# Altium PCB mcu.PcbDoc (part 1 of 3)
Units mil, origin at the board's own origin, x right, y up, seen from the top; angles counter-clockwise.
Board outline 2000 x 2000 mil, 2 copper layers (Top Layer, Bottom Layer); 145 components, 109 nets, 608 pads, 708 vias.
Unrouted connection lines stored in the file: 2.
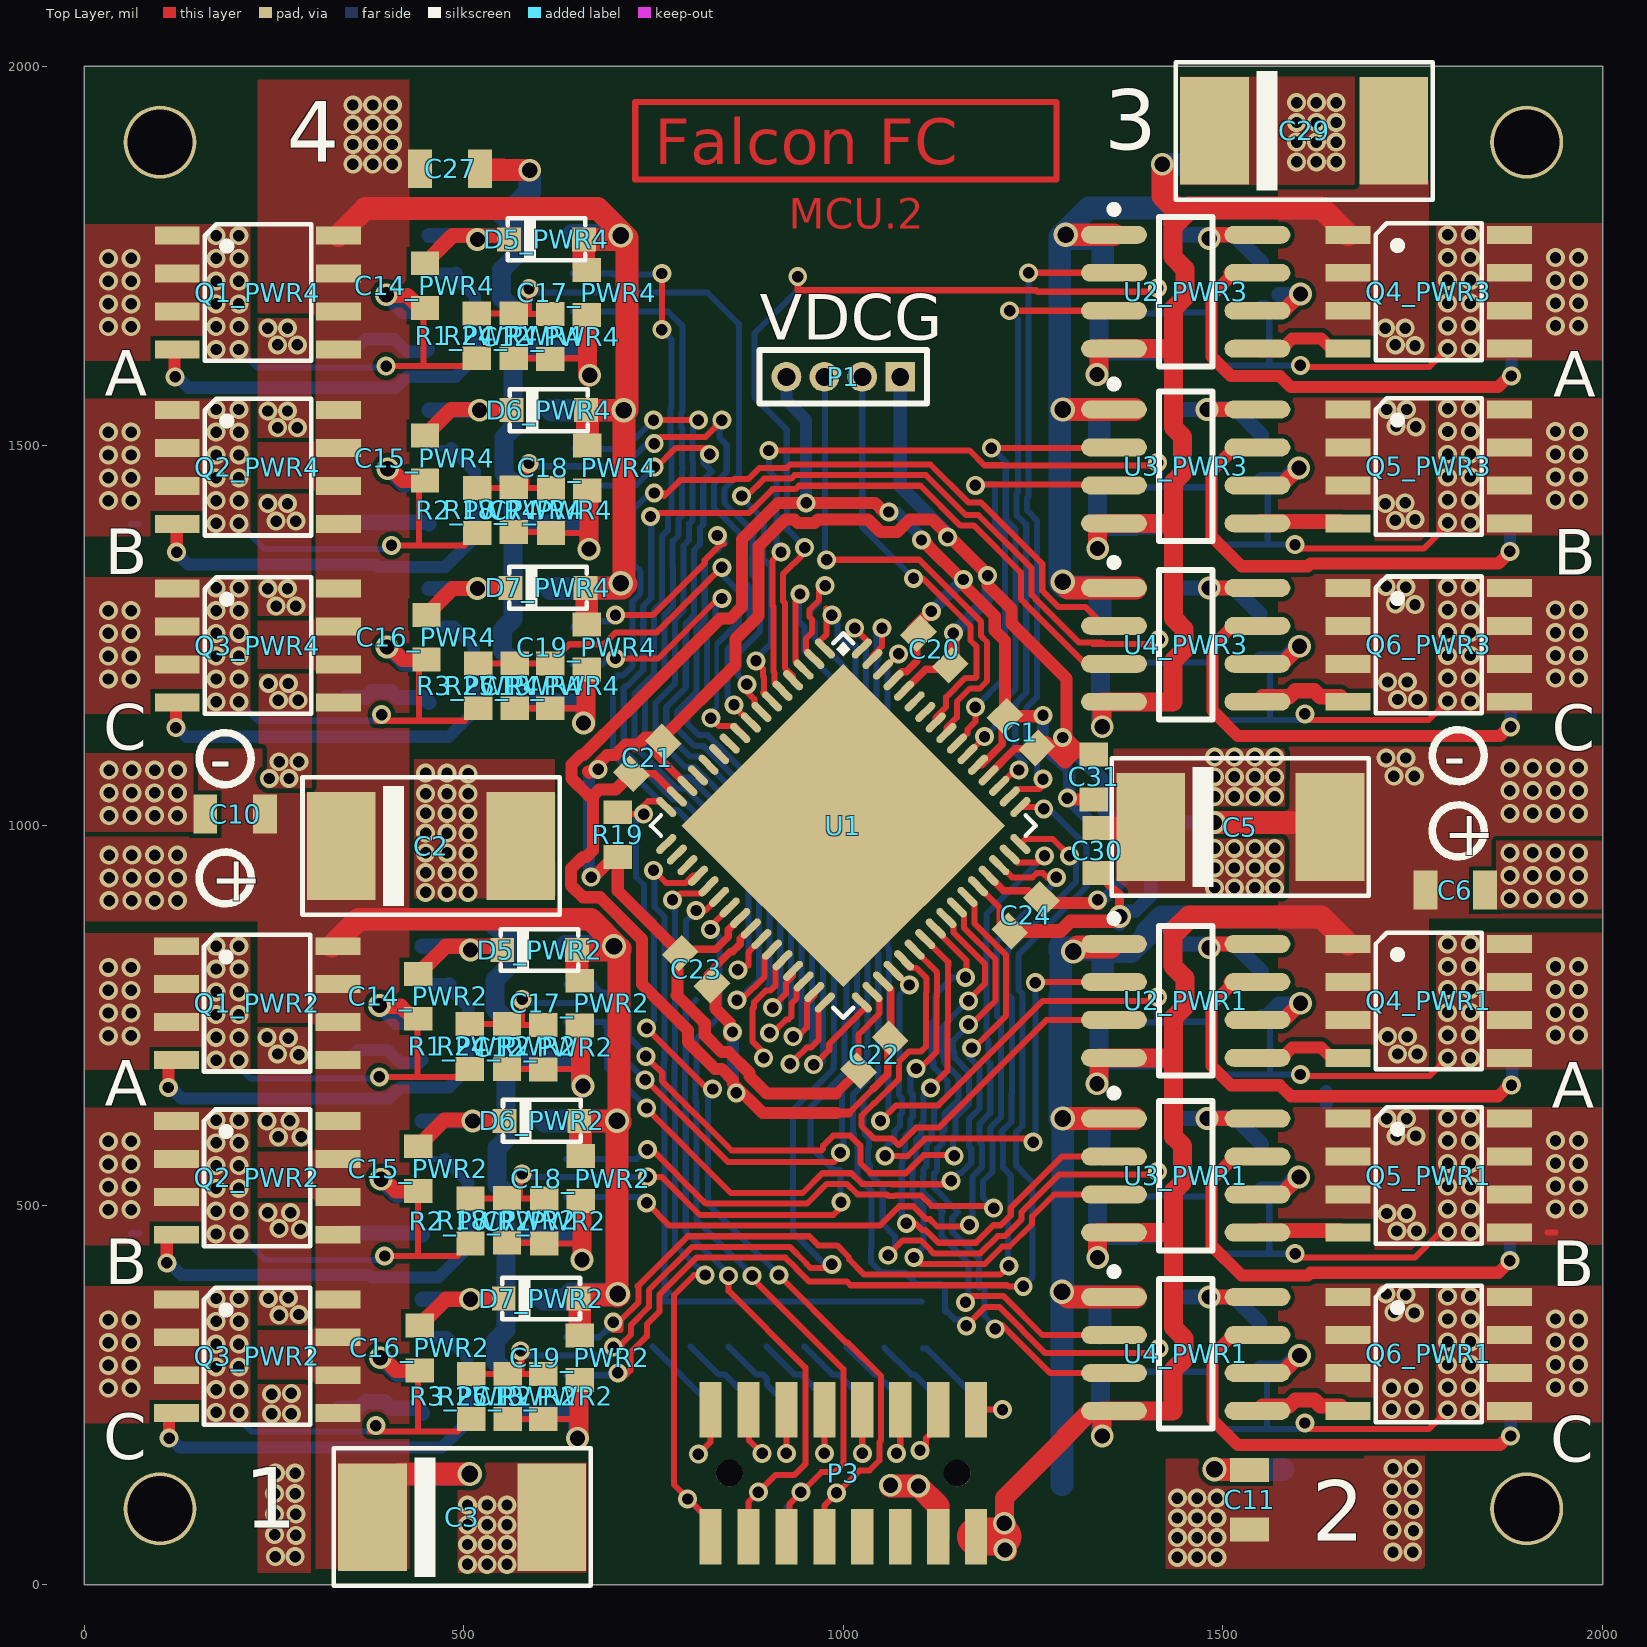
[diagram p0: Top Layer view]
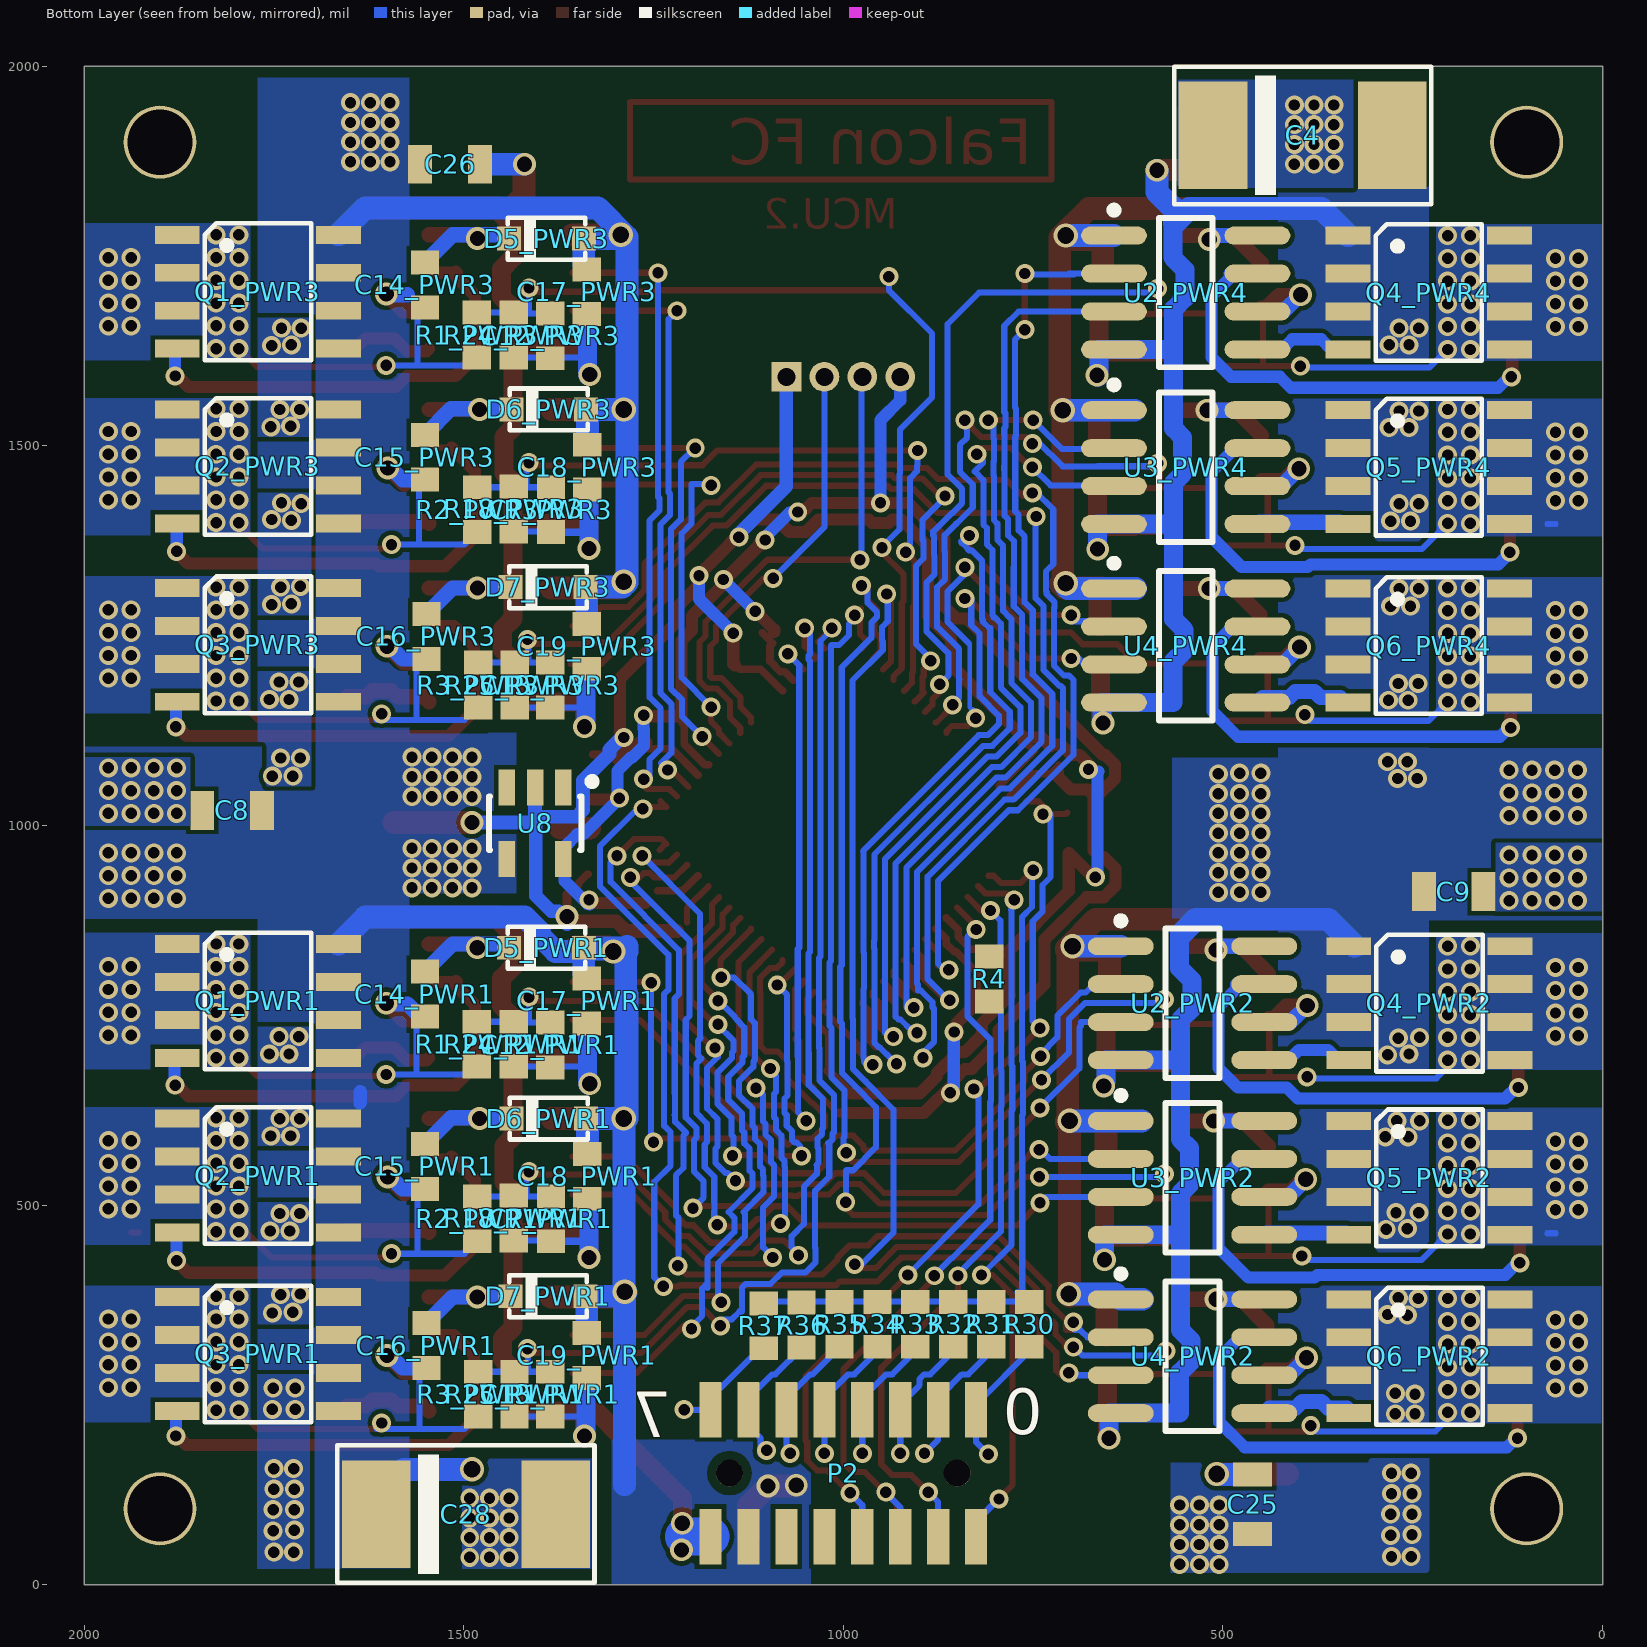
[diagram p1: Bottom Layer view, seen from below]

## Layer stack, top to bottom
Top Layer: signal copper 1.4
Dielectric: dielectric 12.6, FR-4, Dk 4.8
Bottom Layer: signal copper 1.4

## Board outline
0,0 0,2000 2000,2000 2000,0

## Design rules (kind name [scope] priority, off if disabled: settings)
Clearance [All] p1: gap=6
HoleSize [All] p1: absolutevalues=TRUE maxlimit=100 minlimit=15 maxpercent=80.000 minpercent=20.000
MinimumAnnularRing [All] p1: minimumring=5
PlaneClearance [All] p1: clearance=8
PlaneConnect PlaneConnect_1 [All] p1: planeconnectstyle=Relief reliefexpansion=20 reliefentries=4 reliefconductorwidth=10 reliefairgap=10
PlaneConnect [InNet('VBAT')] p2: planeconnectstyle=Direct reliefexpansion=20 reliefentries=4 reliefconductorwidth=10 reliefairgap=10
PolygonConnect PolygonConnect_1 [(InNet('VBAT') OR InNet('VGND') OR InNet('AH1') OR InNetClass('OUTA[1..4]') OR InNetClass('OUTB[1..4]') OR InNetClass('OUTC[1..4]'))] p1: connectstyle=Direct reliefconductorwidth=10 reliefentries=4 polygonreliefangle="90 Angle"
PolygonConnect [All] p2: connectstyle=Relief reliefconductorwidth=10 reliefentries=4 polygonreliefangle="90 Angle"
RoomDefinition PWR3 [InComponentClass('PWR3')] p1: confinementstyle=ConfineIn formatcopy=TRUE lockcomponents=FALSE outline 1268,1831 1915,1831 1915,1109 1268,1109
RoomDefinition PWR4 [InComponentClass('PWR4')] p2: confinementstyle=ConfineIn formatcopy=TRUE lockcomponents=FALSE outline 733,1831 86,1831 86,1109 733,1109
RoomDefinition PWR2 [InComponentClass('PWR2')] p3: confinementstyle=ConfineIn formatcopy=TRUE lockcomponents=FALSE outline 722,894 75,894 75,172 722,172
RoomDefinition PWR1 [InComponentClass('PWR1')] p4: confinementstyle=ConfineIn formatcopy=TRUE lockcomponents=FALSE outline 1270,896 1917,896 1917,174 1270,174
RoutingVias [All] p1: holewidth=15 width=25 viastyle="Through Hole" minholewidth=15 minwidth=25 maxholewidth=100 maxwidth=200
SilkscreenOverComponentPads [All] p1: minsilkscreentomaskgap=10
SolderMaskExpansion [All] p1: expansion=4
Width [All] p1: maxlimit=100 minlimit=6 preferedwidth=6 checkconnectedcopper=TRUE
24 further rules are at their usual default settings.

## Classes and differential pairs
net class OUTC[1..4]: OUTC1 OUTC2 OUTC3 OUTC4
net class OUTB[1..4]: OUTB1 OUTB2 OUTB3 OUTB4
net class OUTA[1..4]: OUTA1 OUTA2 OUTA3 OUTA4
channel class power_channel: PWR1 PWR2 PWR3 PWR4
net class SENSEC[1..4]: SENSEC1 SENSEC2 SENSEC3 SENSEC4
net class SENSEB[1..4]: SENSEB1 SENSEB2 SENSEB3 SENSEB4
net class SENSEA[1..4]: SENSEA1 SENSEA2 SENSEA3 SENSEA4
net class CL[1..4]: CL1 CL2 CL3 CL4
net class CH[1..4]: CH1 CH2 CH3 CH4
net class BL[1..4]: BL1 BL2 BL3 BL4
net class BH[1..4]: BH1 BH2 BH3 BH4
net class AL[1..4]: AL1 AL2 AL3 AL4
net class AH[1..4]: AH1 AH2 AH3 AH4
component class PWR4: C7_PWR4 C12_PWR4 C13_PWR4 C14_PWR4 C15_PWR4 C16_PWR4 C17_PWR4 C18_PWR4 C19_PWR4 D5_PWR4 D6_PWR4 D7_PWR4 Q1_PWR4 Q2_PWR4 Q3_PWR4 Q4_PWR4 Q5_PWR4 Q6_PWR4 R1_PWR4 R2_PWR4 R3_PWR4 R18_PWR4 R24_PWR4 R25_PWR4 TP9_PWR4 TP10_PWR4 TP11_PWR4 TP12_PWR4 TP13_PWR4 TP14_PWR4 TP15_PWR4 TP16_PWR4 TP17_PWR4 TP18_PWR4 TP19_PWR4 TP20_PWR4 TP21_PWR4 TP22_PWR4 TP23_PWR4 TP24_PWR4 TP25_PWR4 TP26_PWR4 U2_PWR4 U3_PWR4 U4_PWR4
component class PWR3: C7_PWR3 C12_PWR3 C13_PWR3 C14_PWR3 C15_PWR3 C16_PWR3 C17_PWR3 C18_PWR3 C19_PWR3 D5_PWR3 D6_PWR3 D7_PWR3 Q1_PWR3 Q2_PWR3 Q3_PWR3 Q4_PWR3 Q5_PWR3 Q6_PWR3 R1_PWR3 R2_PWR3 R3_PWR3 R18_PWR3 R24_PWR3 R25_PWR3 TP9_PWR3 TP10_PWR3 TP11_PWR3 TP12_PWR3 TP13_PWR3 TP14_PWR3 TP15_PWR3 TP16_PWR3 TP17_PWR3 TP18_PWR3 TP19_PWR3 TP20_PWR3 TP21_PWR3 TP22_PWR3 TP23_PWR3 TP24_PWR3 TP25_PWR3 TP26_PWR3 U2_PWR3 U3_PWR3 U4_PWR3
component class PWR2: C7_PWR2 C12_PWR2 C13_PWR2 C14_PWR2 C15_PWR2 C16_PWR2 C17_PWR2 C18_PWR2 C19_PWR2 D5_PWR2 D6_PWR2 D7_PWR2 Q1_PWR2 Q2_PWR2 Q3_PWR2 Q4_PWR2 Q5_PWR2 Q6_PWR2 R1_PWR2 R2_PWR2 R3_PWR2 R18_PWR2 R24_PWR2 R25_PWR2 TP9_PWR2 TP10_PWR2 TP11_PWR2 TP12_PWR2 TP13_PWR2 TP14_PWR2 TP15_PWR2 TP16_PWR2 TP17_PWR2 TP18_PWR2 TP19_PWR2 TP20_PWR2 TP21_PWR2 TP22_PWR2 TP23_PWR2 TP24_PWR2 TP25_PWR2 TP26_PWR2 U2_PWR2 U3_PWR2 U4_PWR2
component class PWR1: C7_PWR1 C12_PWR1 C13_PWR1 C14_PWR1 C15_PWR1 C16_PWR1 C17_PWR1 C18_PWR1 C19_PWR1 D5_PWR1 D6_PWR1 D7_PWR1 Q1_PWR1 Q2_PWR1 Q3_PWR1 Q4_PWR1 Q5_PWR1 Q6_PWR1 R1_PWR1 R2_PWR1 R3_PWR1 R18_PWR1 R24_PWR1 R25_PWR1 TP9_PWR1 TP10_PWR1 TP11_PWR1 TP12_PWR1 TP13_PWR1 TP14_PWR1 TP15_PWR1 TP16_PWR1 TP17_PWR1 TP18_PWR1 TP19_PWR1 TP20_PWR1 TP21_PWR1 TP22_PWR1 TP23_PWR1 TP24_PWR1 TP25_PWR1 TP26_PWR1 U2_PWR1 U3_PWR1 U4_PWR1
component class mcu: C1 C2 C3 C4 C5 C6 C7 C8 C9 C10 C11 C12 C15 C16 C18 C19 C20 C21 C22 C23 C24 C25 C26 C27 C28 C29 C30 C31 C32 C33 C34 C35 C36 C37 C38 C39 C40 C41 C42 C43 D6 D7 D8 D9 D10 D11 D12 D13 D14 D15 D16 P1 P2 P3 Q7 Q8 Q9 Q10 Q11 Q12 Q13 Q14 Q15 Q16 Q17 Q18 Q19 Q20 Q21 Q22 Q23 Q24 R2 R3 R4 R5 R6 R7 R8 R9 R10 R11 R12 R13 R14 R15 R16 R17 R18 R19 R20 R21 R22 R23 R24 R30 R31 R32 R33 R34 R35 R36 R37 TP1 TP2 TP3 TP4 TP5 TP6 TP7 TP8 TP? U1 U5 U6 U7 U8 U9 U10 U11 U12 U13 U14

## Components (designator, comment, footprint, x,y, rotation, side; value= is the part's Value field where it differs from the comment)
C1 "Capacitor" "0603 (1608)" 1234,1123 r315 top
C2 "Polarized Capacitor" "7343 (TANT E)" 457,973 r0 top
C3 "Polarized Capacitor" "7343 (TANT E)" 498,89 r0 top
C4 "Polarized Capacitor" "7343 (TANT E)" 395,1909 r180 bottom
C5 "Polarized Capacitor" "7343 (TANT E)" 1523,998 r0 top
C6 "Capacitor" "0805 (2012)" 1806,915 r180 top
C7_PWR1 "Capacitor" "0603 (1608)" 1385,482 r270 bottom (schematic designator C7)
C7_PWR2 "Capacitor" "0603 (1608)" 606.01,479 r270 top (schematic designator C7)
C7_PWR3 "Capacitor" "0603 (1608)" 1384.99,1416 r270 bottom (schematic designator C7)
C7_PWR4 "Capacitor" "0603 (1608)" 615.01,1415 r270 top (schematic designator C7)
C8 "Capacitor" "0805 (2012)" 1805,1020 r0 bottom
C9 "Capacitor" "0805 (2012)" 196,913 r0 bottom
C10 "Capacitor" "0805 (2012)" 199,1015 r180 top
C11 "Capacitor" "0805 (2012)" 1535,112 r270 top
C12_PWR1 "Capacitor" "0603 (1608)" 1386,711 r270 bottom (schematic designator C12)
C12_PWR2 "Capacitor" "0603 (1608)" 605.01,708 r270 top (schematic designator C12)
C12_PWR3 "Capacitor" "0603 (1608)" 1385.99,1645 r270 bottom (schematic designator C12)
C12_PWR4 "Capacitor" "0603 (1608)" 614.01,1644 r270 top (schematic designator C12)
C13_PWR1 "Capacitor" "0603 (1608)" 1386,251 r270 bottom (schematic designator C13)
C13_PWR2 "Capacitor" "0603 (1608)" 605.01,248 r270 top (schematic designator C13)
C13_PWR3 "Capacitor" "0603 (1608)" 1385.99,1185 r270 bottom (schematic designator C13)
C13_PWR4 "Capacitor" "0603 (1608)" 614.01,1184 r270 top (schematic designator C13)
C14_PWR1 "Capacitor" "0603 (1608)" 1551,778 r270 bottom (schematic designator C14)
C14_PWR2 "Capacitor" "0603 (1608)" 440.01,775 r270 top (schematic designator C14)
C14_PWR3 "Capacitor" "0603 (1608)" 1550.99,1712 r270 bottom (schematic designator C14)
C14_PWR4 "Capacitor" "0603 (1608)" 449.01,1711 r270 top (schematic designator C14)
C15_PWR1 "Capacitor" "0603 (1608)" 1551,551 r270 bottom (schematic designator C15)
C15_PWR2 "Capacitor" "0603 (1608)" 440.01,548 r270 top (schematic designator C15)
C15_PWR3 "Capacitor" "0603 (1608)" 1550.99,1485 r270 bottom (schematic designator C15)
C15_PWR4 "Capacitor" "0603 (1608)" 449.01,1484 r270 top (schematic designator C15)
C16_PWR1 "Capacitor" "0603 (1608)" 1549,315 r270 bottom (schematic designator C16)
C16_PWR2 "Capacitor" "0603 (1608)" 442.01,312 r270 top (schematic designator C16)
C16_PWR3 "Capacitor" "0603 (1608)" 1548.99,1249 r270 bottom (schematic designator C16)
C16_PWR4 "Capacitor" "0603 (1608)" 451.01,1248 r270 top (schematic designator C16)
C17_PWR1 "Capacitor" "0603 (1608)" 1338,769 r270 bottom (schematic designator C17)
C17_PWR2 "Capacitor" "0603 (1608)" 653.01,766 r270 top (schematic designator C17)
C17_PWR3 "Capacitor" "0603 (1608)" 1337.99,1703 r270 bottom (schematic designator C17)
C17_PWR4 "Capacitor" "0603 (1608)" 662.01,1702 r270 top (schematic designator C17)
C18_PWR1 "Capacitor" "0603 (1608)" 1337,538 r270 bottom (schematic designator C18)
C18_PWR2 "Capacitor" "0603 (1608)" 654.01,535 r270 top (schematic designator C18)
C18_PWR3 "Capacitor" "0603 (1608)" 1336.99,1472 r270 bottom (schematic designator C18)
C18_PWR4 "Capacitor" "0603 (1608)" 663.01,1471 r270 top (schematic designator C18)
C19_PWR1 "Capacitor" "0603 (1608)" 1338,302 r270 bottom (schematic designator C19)
C19_PWR2 "Capacitor" "0603 (1608)" 653.01,299 r270 top (schematic designator C19)
C19_PWR3 "Capacitor" "0603 (1608)" 1337.99,1236 r270 bottom (schematic designator C19)
C19_PWR4 "Capacitor" "0603 (1608)" 662.01,1235 r270 top (schematic designator C19)
C20 "Capacitor" "0603 (1608)" 1120,1232 r315 top
C21 "Capacitor" "0603 (1608)" 742,1089 r45 top
C22 "Capacitor" "0603 (1608)" 1041,698 r225 top
C23 "Capacitor" "0603 (1608)" 806,811 r135 top
C24 "Capacitor" "0603 (1608)" 1240,882 r225 top
C25 "Capacitor" "0805 (2012)" 461,106 r270 bottom
C26 "Capacitor" "0805 (2012)" 1518,1871 r180 bottom
C27 "Capacitor" "0805 (2012)" 482,1865 r0 top
C28 "Polarized Capacitor" "7343 (TANT E)" 1497,93 r180 bottom
C29 "Polarized Capacitor" "7343 (TANT E)" 1607,1915 r0 top
C30 "Capacitor" "0603 (1608)" 1334,967 r270 top
C31 "Capacitor" "0603 (1608)" 1330,1064 r90 top
D5_PWR1 "Schottky Diode" SOD-323 1391,839 r180 bottom (schematic designator D5)
D5_PWR2 "Schottky Diode" SOD-323 600.01,836 r0 top (schematic designator D5)
D5_PWR3 "Schottky Diode" SOD-323 1390.99,1773 r180 bottom (schematic designator D5)
D5_PWR4 "Schottky Diode" SOD-323 609.01,1772 r0 top (schematic designator D5)
D6_PWR1 "Schottky Diode" SOD-323 1388,614 r180 bottom (schematic designator D6)
D6_PWR2 "Schottky Diode" SOD-323 603.01,611 r0 top (schematic designator D6)
D6_PWR3 "Schottky Diode" SOD-323 1387.99,1548 r180 bottom (schematic designator D6)
D6_PWR4 "Schottky Diode" SOD-323 612.01,1547 r0 top (schematic designator D6)
D7_PWR1 "Schottky Diode" SOD-323 1389,380 r180 bottom (schematic designator D7)
D7_PWR2 "Schottky Diode" SOD-323 602.01,377 r0 top (schematic designator D7)
D7_PWR3 "Schottky Diode" SOD-323 1388.99,1314 r180 bottom (schematic designator D7)
D7_PWR4 "Schottky Diode" SOD-323 611.01,1313 r0 top (schematic designator D7)
P1 "MHDR1X4" MHDR1X4 1075,1591 r180 top
P2 "2x8smd0.5female" S9007E-08-ND 1000,147 r0 bottom
P3 "2x8smd0.5male" S9007E-08-ND-noholes 1000,147 r0 top
Q1_PWR1 "IRF8734" SO8 1771,769 r180 bottom (schematic designator Q1)
Q1_PWR2 "IRF8734" SO8 228.01,766 r0 top (schematic designator Q1)
Q1_PWR3 "IRF8734" SO8 1770.99,1703 r180 bottom (schematic designator Q1)
Q1_PWR4 "IRF8734" SO8 229.01,1702 r0 top (schematic designator Q1)
Q2_PWR1 "IRF8734" SO8 1771,539 r180 bottom (schematic designator Q2)
Q2_PWR2 "IRF8734" SO8 228.01,536 r0 top (schematic designator Q2)
Q2_PWR3 "IRF8734" SO8 1770.99,1473 r180 bottom (schematic designator Q2)
Q2_PWR4 "IRF8734" SO8 229.01,1472 r0 top (schematic designator Q2)
Q3_PWR1 "IRF8734" SO8 1771,304 r180 bottom (schematic designator Q3)
Q3_PWR2 "IRF8734" SO8 228.01,301 r0 top (schematic designator Q3)
Q3_PWR3 "IRF8734" SO8 1770.99,1238 r180 bottom (schematic designator Q3)
Q3_PWR4 "IRF8734" SO8 229.01,1237 r0 top (schematic designator Q3)
Q4_PWR1 "IRF8734" SO8 1771,769 r0 top (schematic designator Q4)
Q4_PWR2 "IRF8734" SO8 228.01,766 r180 bottom (schematic designator Q4)
Q4_PWR3 "IRF8734" SO8 1770.99,1703 r0 top (schematic designator Q4)
Q4_PWR4 "IRF8734" SO8 229.01,1702 r180 bottom (schematic designator Q4)
Q5_PWR1 "IRF8734" SO8 1771,539 r0 top (schematic designator Q5)
Q5_PWR2 "IRF8734" SO8 228.01,536 r180 bottom (schematic designator Q5)
Q5_PWR3 "IRF8734" SO8 1770.99,1473 r0 top (schematic designator Q5)
Q5_PWR4 "IRF8734" SO8 229.01,1472 r180 bottom (schematic designator Q5)
Q6_PWR1 "IRF8734" SO8 1771,304 r0 top (schematic designator Q6)
Q6_PWR2 "IRF8734" SO8 228.01,301 r180 bottom (schematic designator Q6)
Q6_PWR3 "IRF8734" SO8 1770.99,1238 r0 top (schematic designator Q6)
Q6_PWR4 "IRF8734" SO8 229.01,1237 r180 bottom (schematic designator Q6)
R1_PWR1 "Resistor" "0603 (1608)" 1483,712 r270 bottom (schematic designator R1)
R1_PWR2 "Resistor" "0603 (1608)" 508.01,709 r270 top (schematic designator R1)
R1_PWR3 "Resistor" "0603 (1608)" 1482.99,1646 r270 bottom (schematic designator R1)
R1_PWR4 "Resistor" "0603 (1608)" 517.01,1645 r270 top (schematic designator R1)
R2_PWR1 "Resistor" "0603 (1608)" 1482,482 r270 bottom (schematic designator R2)
R2_PWR2 "Resistor" "0603 (1608)" 509.01,479 r270 top (schematic designator R2)
R2_PWR3 "Resistor" "0603 (1608)" 1481.99,1416 r270 bottom (schematic designator R2)
R2_PWR4 "Resistor" "0603 (1608)" 518.01,1415 r270 top (schematic designator R2)
R3_PWR1 "Resistor" "0603 (1608)" 1481,251 r270 bottom (schematic designator R3)
R3_PWR2 "Resistor" "0603 (1608)" 510.01,248 r270 top (schematic designator R3)
R3_PWR3 "Resistor" "0603 (1608)" 1480.99,1185 r270 bottom (schematic designator R3)
R3_PWR4 "Resistor" "0603 (1608)" 519.01,1184 r270 top (schematic designator R3)
R4 "Resistor" "0603 (1608)" 808,798 r90 bottom
R18_PWR1 "Resistor" "0603 (1608)" 1434,483 r270 bottom (schematic designator R18)
R18_PWR2 "Resistor" "0603 (1608)" 557.01,480 r270 top (schematic designator R18)
R18_PWR3 "Resistor" "0603 (1608)" 1433.99,1417 r270 bottom (schematic designator R18)
R18_PWR4 "Resistor" "0603 (1608)" 566.01,1416 r270 top (schematic designator R18)
R19 "Resistor" "0603 (1608)" 703,988 r90 top
R24_PWR1 "Resistor" "0603 (1608)" 1434,712 r270 bottom (schematic designator R24)
R24_PWR2 "Resistor" "0603 (1608)" 557.01,709 r270 top (schematic designator R24)
R24_PWR3 "Resistor" "0603 (1608)" 1433.99,1646 r270 bottom (schematic designator R24)
R24_PWR4 "Resistor" "0603 (1608)" 566.01,1645 r270 top (schematic designator R24)
R25_PWR1 "Resistor" "0603 (1608)" 1433,251 r270 bottom (schematic designator R25)
R25_PWR2 "Resistor" "0603 (1608)" 558.01,248 r270 top (schematic designator R25)
R25_PWR3 "Resistor" "0603 (1608)" 1432.99,1185 r270 bottom (schematic designator R25)
R25_PWR4 "Resistor" "0603 (1608)" 567.01,1184 r270 top (schematic designator R25)
R30 "Resistor" "0603 (1608)" 755,343 r270 bottom
R31 "Resistor" "0603 (1608)" 805,343 r270 bottom
R32 "Resistor" "0603 (1608)" 855,343 r270 bottom
R33 "Resistor" "0603 (1608)" 905,343 r270 bottom
R34 "Resistor" "0603 (1608)" 955,343 r270 bottom
R35 "Resistor" "0603 (1608)" 1005,343 r270 bottom
R36 "Resistor" "0603 (1608)" 1055,342 r270 bottom
R37 "Resistor" "0603 (1608)" 1105,341 r270 bottom
U1 "ATXMEGAA3" QFN-64 1000,1000 r315 top
U2_PWR1 "LM5109BMA" M08A_N 1451,769 r0 top (schematic designator U2)
U2_PWR2 "LM5109BMA" M08A_N 540.01,766 r180 bottom (schematic designator U2)
U2_PWR3 "LM5109BMA" M08A_N 1450.99,1703 r0 top (schematic designator U2)
U2_PWR4 "LM5109BMA" M08A_N 549.01,1702 r180 bottom (schematic designator U2)
U3_PWR1 "LM5109BMA" M08A_N 1451,539 r0 top (schematic designator U3)
U3_PWR2 "LM5109BMA" M08A_N 540.01,536 r180 bottom (schematic designator U3)
U3_PWR3 "LM5109BMA" M08A_N 1450.99,1473 r0 top (schematic designator U3)
U3_PWR4 "LM5109BMA" M08A_N 549.01,1472 r180 bottom (schematic designator U3)
U4_PWR1 "LM5109BMA" M08A_N 1451,304 r0 top (schematic designator U4)
U4_PWR2 "LM5109BMA" M08A_N 540.01,301 r180 bottom (schematic designator U4)
U4_PWR3 "LM5109BMA" M08A_N 1450.99,1238 r0 top (schematic designator U4)
U4_PWR4 "LM5109BMA" M08A_N 549.01,1237 r180 bottom (schematic designator U4)
U8 "TPS71533" SOT23-5 1406,1003 r270 bottom

## Footprints (in the part's own frame and the unit in brackets; to place one, negate y for a bottom-side part, rotate by r counter-clockwise, add the part's x,y. Pads: shape width x height; smd on the part's side, far side on the other; paste and mask are expansions set on the pad)
"0603 (1608)" [mm] "Chip 2-Leads 0603 (1608)"
  rect 0.8x0.95 smd mask+0: 1(-0.75,0) 2(0.75,0)
  body extent -0.77,-0.43 0.77,0.43, height 0.55
"0805 (2012)" [mm] "Chip 2-Leads, IPC Medium Density (2012)"
  rect 0.8x1.3 smd mask+0: 1(-1,0) 2(1,0)
  body extent -1.05,-0.63 1.05,0.63, height 0.5
"7343 (TANT E)" [mm] "Tantalum SMT Case E 7343"
  rect 2.3x3.6 smd paste-0.15 mask+0.025: 1(-3,0) 2(3,0)
  silkscreen extent -4.3,-2.3 4.3,2.3, body extent -3.65,-2.14 3.65,2.16, height 2.25
M08A_N [mm] "SOIC, 8-Leads, Body 4.9x3.9mm, Pitch 1.27mm, IPC Medium Density"
  oval 2.2x0.6 smd: 1(-2.4,1.905) 2(-2.4,0.635) 3(-2.4,-0.635) 4(-2.4,-1.905) 5(2.4,-1.905) 6(2.4,-0.635) 7(2.4,0.635) 8(2.4,1.905)
  silkscreen extent -2.52,-2.5 0.9,2.88, body extent -2,-2.5 2,2.5, height 1.75
MHDR1X4 [mm] "Connector; Header; 4 Position"
  rect 1x1 hole 0.6: 1(0,0)
  round 1 hole 0.6: 2(1.27,0) 3(2.54,0) 4(3.81,0)
  silkscreen extent -0.9,-0.9 4.71,0.9
QFN-64 [mm] "64M2, 64-pad, 9 x 9 x 1.0 mm Body, Lead Pitch 0.50mm 7.65mm Exposed Pad"
  oval 0.85x0.25 smd paste-0.02 mask+0.02: 1(-4.625,3.75) 2(-4.625,3.25) 3(-4.625,2.75) 4(-4.625,2.25) 5(-4.625,1.75) 6(-4.625,1.25) 7(-4.625,0.75) 8(-4.625,0.25) 9(-4.625,-0.25) 10(-4.625,-0.75) 11(-4.625,-1.25) 12(-4.625,-1.75) 13(-4.625,-2.25) 14(-4.625,-2.75) 15(-4.625,-3.25) 16(-4.625,-3.75) 33(4.625,-3.75) 34(4.625,-3.25) 35(4.625,-2.75) 36(4.625,-2.25) 37(4.625,-1.75) 38(4.625,-1.25) 39(4.625,-0.75) 40(4.625,-0.25) 41(4.625,0.25) 42(4.625,0.75) 43(4.625,1.25) 44(4.625,1.75) 45(4.625,2.25) 46(4.625,2.75) 47(4.625,3.25) 48(4.625,3.75)
  oval 0.25x0.85 smd paste-0.02 mask+0.02: 17(-3.75,-4.625) 18(-3.25,-4.625) 19(-2.75,-4.625) 20(-2.25,-4.625) 21(-1.75,-4.625) 22(-1.25,-4.625) 23(-0.75,-4.625) 24(-0.25,-4.625) 25(0.25,-4.625) 26(0.75,-4.625) 27(1.25,-4.625) 28(1.75,-4.625) 29(2.25,-4.625) 30(2.75,-4.625) 31(3.25,-4.625) 32(3.75,-4.625) 49(3.75,4.625) 50(3.25,4.625) 51(2.75,4.625) 52(2.25,4.625) 53(1.75,4.625) 54(1.25,4.625) 55(0.75,4.625) 56(0.25,4.625) 57(-0.25,4.625) 58(-0.75,4.625) 59(-1.25,4.625) 60(-1.75,4.625) 61(-2.25,4.625) 62(-2.75,4.625) 63(-3.25,4.625) 64(-3.75,4.625)
  rect 7.65x7.65 smd paste-10 mask+0.051: 65(0,0)
  silkscreen extent -4.55,-4.55 4.55,4.55, body extent -4.55,-4.55 4.55,4.55, height 1
S9007E-08-ND [mm] "16 0.05\" smd header - female"
  round 0.889 hole 0.9 unplated: 0(-3.81,0) 0(3.81,0)
  rect 0.74x1.85 smd: 1(-4.445,2.125) 2(-4.445,-2.125) 3(-3.175,2.125) 4(-3.175,-2.125) 5(-1.905,2.125) 6(-1.905,-2.125) 7(-0.635,2.125) 8(-0.635,-2.125) 9(0.635,2.125) 10(0.635,-2.125) 11(1.905,2.125) 12(1.905,-2.125) 13(3.175,2.125) 14(3.175,-2.125) 15(4.445,2.125) 16(4.445,-2.125)
S9007E-08-ND-noholes [mm] "16 0.05\" smd header - female"
  rect 0.74x1.85 smd: 1(-4.445,2.125) 2(-4.445,-2.125) 3(-3.175,2.125) 4(-3.175,-2.125) 5(-1.905,2.125) 6(-1.905,-2.125) 7(-0.635,2.125) 8(-0.635,-2.125) 9(0.635,2.125) 10(0.635,-2.125) 11(1.905,2.125) 12(1.905,-2.125) 13(3.175,2.125) 14(3.175,-2.125) 15(4.445,2.125) 16(4.445,-2.125)
SO8 [mm] "M8.15 (JEDEC MS-012-AA ISSUE C)  8 LEAD NARROW BODY SMALL OUTLINE PLASTIC  PACKAGE"
  rect 1.5x0.6 smd mask+0.025: 1(-2.7,1.905) 2(-2.7,0.635) 3(-2.7,-0.635) 4(-2.7,-1.905) 5(2.7,-1.905) 6(2.7,-0.635) 7(2.7,0.635) 8(2.7,1.905)
  silkscreen extent -1.78,-2.29 1.78,2.29, body extent -2.9,-2.39 2.9,2.41, height 1.75
SOD-323 [mm] "SOD323 Diode"
  rect 0.8x0.8 smd paste-0.025 mask+0.025: 1(1.25,0) 2(-1.25,0)
  silkscreen extent -1.3,-0.7 1.3,0.7, body extent -1.3,-0.67 1.3,0.67, height 1.1
SOT23-5 [mm] "SOT23, 5-Leads, Body 3.0x3.0mm (max), Pitch 0.95mm"
  rect 1.2x0.55 smd: 1(-1.2,0.95) 2(-1.2,0) 3(-1.2,-0.95) 4(1.2,-0.95) 5(1.2,0.95)
  silkscreen extent -1.52,-1.55 0.9,2.03, body extent -1.4,-1.45 1.4,1.45, height 1.09

## Part data
P1: "Header, 4-Pin"
U2_PWR1 U2_PWR2 U2_PWR3 U2_PWR4 U3_PWR1 U3_PWR2 U3_PWR3 U3_PWR4 U4_PWR1 U4_PWR2 U4_PWR3 U4_PWR4: "High Voltage 1A Peak Half Bridge Gate Driver"

## Free pads (board coordinates)
  round 96 hole 86: 1(100,100) 2(1900,100) 3(1900,1900) 4(100,1900)

## Via types
v1: diameter 25, hole 15, Top Layer to Bottom Layer, tented both sides, 650 vias
v2: diameter 30, hole 20, Top Layer to Bottom Layer, tented both sides, 44 vias
v3: diameter 32, hole 22, Top Layer to Bottom Layer, tented both sides, 14 vias

## Nets (pads, with @x,y where several pads share a name; then routed paths per layer and width w, separated by ;. In a path a pad name is that pad's centre, name@x,y a point inside that pad or via, vN(x,y) a via of type N, cw(c..) or ccw(c..) an arc to the next point about the centre after c; other vN are vias at no path point)
AH1: U1.36 U2_PWR1.2 | length 810.2
  Top Layer w8: v1@1057,565 1085.2,565 1107.7,587.5 v1@1250,587.5 ; U1.36@1061.12,813.61 U1.36@1066.12,808.61 v1@1087,787.73 ; v1@1087,784 v1@1087,787 ; v1(1087,790) v1@1087,787.73 ; v1@1254,794 1307,794 U2_PWR1.2@1356.51,794 ; v1@1087,787 v1@1087,787.73 ; v1@1087,787 1088.27,785.73 1089,785.73 v1@1087,787.73
  Bottom Layer w8: v1(1055,565) v1@1057,565 ; v1(1087,790) 1074,777 1074,689.82 1073.5,689.32 1073.5,644.32 1077.5,640.32 1077.5,621.68 1074.5,618.68 1074.5,604.52 1067.5,597.52 1067.5,585.68 1064.32,582.5 1061.5,582.5 1057,578 v1@1057,565 ; v1@1253,586 v1(1253,793) ; v1@1057,565 1059,565 1059,564 1057,564 v1@1057,565
  other v1: 1250,583
AH2: U1.42 U2_PWR2.2 | length 1048.6
  Top Layer w8: v1@741,695 748,688 748,687.82 761.5,674.32 761.5,663.3 852.8,572 971.18,572 973.5,574.32 973.5,578.32 986.68,591.5 1009.32,591.5 1022.5,578.32 1022.5,555.5 1036,542 1082,542 1106,566 v1@1144,566 ; U1.42@1149.63,892.12 1159.07,882.69 1159.07,864.96 1200.5,823.53 1200.5,769.5 1187.86,756.86 ; v1@1175,744.36 1187.5,756.86
  Bottom Layer w8: U2_PWR2.2@634.5,791 672,791 672,789 681,780 687.6,780 718,749.6 718,721 740,699 v1(740,696) ; 1144.5,702.92 1144.5,716.5 v1@1165,737 ; 1146.5,700.92 1146.5,693.92 1165.5,674.92 1165.5,633.08 1147.5,615.08 1147.5,592.69 1144.5,589.69 1144.5,573.5 v1@1147,571
  other v1: 1146,565 1165,738
AH3: U1.50 U2_PWR3.2 | length 905.6
  Top Layer w8: U1.50@1219.23,1038.28 1228.95,1048 1258,1048 1271,1061 1269,1063 1262,1063 1262,1061 v1(1263,1061) ; v1(1244,1728) 1296.99,1728 U2_PWR3.2@1356.5,1728
  Bottom Layer w8: 1242,1420 1242,1415 ; v1(1244,1728) 1244,1433 1242,1431 1242,1415 ; v1(1263,1061) 1262,1061 1262,1063 1269,1063 1271,1061 1255,1061 1255,1087.07 1240.5,1101.57 1240.5,1154.32 1255,1168.82 1255,1402 1242,1415
AH4: U1.28 U2_PWR4.2 | length 1437.5
  Top Layer w8: v1(761,1653) v1(761,1727) ; v1(895,694) 895,700.97 880.5,715.47 880.5,758.68 882.5,760.68 882.5,767.32 897.68,782.5 904.06,782.5 910.45,788.89 910.45,813.01 U1.28@919.96,822.53
  Bottom Layer w8: U2_PWR4.2@643.5,1727 703.01,1727 ; 696,1726 760,1726 v1(761,1727) ; v1(761,1653) 774,1640 774,1550.62 772.5,1549.12 772.5,1513.32 773.5,1512.32 773.5,1413.72 769,1409.22 769,1388.82 761.1,1380.92 761.1,1294.1 750.5,1283.5 750.5,1199.08 724.81,1173.39 724.81,1104.78 780.58,1049 792.6,1049 903,938.6 903,791.82 901.5,790.32 901.5,782.5 897.68,782.5 882.5,767.32 882.5,760.68 880.5,758.68 880.5,715.47 895,700.97 v1(895,694)
AL1: U1.37 U2_PWR1.3 | length 692.7
  Top Layer w8: U1.37@1080.04,822.53 1080.04,819.96 1087.5,812.5 1096.32,812.5 1109.5,799.32 1109.5,780.68 1109,780.18 1109,728.41 ; 1109,724.82 1109,709 1102.5,702.5 1086.68,702.5 1073.5,689.32 1073.5,666.5 1041.5,634.5 1040.5,634.5 1024,618 1024,604.18 1040.68,587.5 1064.32,587.5 1072.82,579 1073,579 1096,602 1126,602 1268,744 1301,744 ; 1297,744 U2_PWR1.3@1356.51,744
AL2: U1.43 U2_PWR2.3 | length 1104.8
  Top Layer w8: v1@738,630 852,516 946.38,516 972.38,542 1010.62,542 1024.62,528 1063.62,528 1064.12,527.5 1143.5,527.5 v1@1144,528 ; U1.43@1163.55,906.04 1163.55,905.45 1173.07,895.93 1173.07,870.76 1214.5,829.33 1214.5,749.5 v1@1172,707
  Bottom Layer w8: U2_PWR2.3@634.5,741 687,741 687,736.18 689,734.18 689,680 v1(741,628) ; v1(1142,532) v1@1143,532 ; v1@1150,531 1149,532 v1@1143,532 ; v1@1169,705.5 1165,701.5 1165,695.22 1179.5,680.72 1179.5,627.28 1165.5,613.28 1165.5,577.32 1168.5,574.32 1168.5,555.68 1155.32,542.5 1152.32,542.5 1143,533.18 v1@1143,532
  other v1: 1169,707
AL3: U1.51 U2_PWR3.3 | length 824.2
  Top Layer w8: U1.51@1204,1051 1222,1069 1235.39,1069 v1(1231.24,1073.15) ; v1(1219,1678) 1308,1678 ; 1296.99,1678 1308,1678 ; U2_PWR3.3@1356.5,1678 1308,1678
  Bottom Layer w8: v1(1219,1678) 1230,1667 1230,1438.8 1228,1436.8 1228,1409.2 1241,1396.2 1241,1174.62 1226.5,1160.12 1226.5,1095.77 1240.18,1082.09 v1(1231.24,1073.15)
AL4: U1.29 U2_PWR4.3 | length 1241.9
  Top Layer w8: v1(907,760) 909,758 909,755.62 910.62,754 910.62,764.33 924.45,778.16 924.45,792.44 933.88,801.87 U1.29@933.88,808.61
  Bottom Layer w8: U2_PWR4.3@643.5,1677 769,1677 788,1658 788,1544.82 786.5,1543.32 786.5,1524.68 788,1523.18 788,1515.62 787.5,1515.12 787.5,1473.88 788,1473.38 788,1468.02 787.5,1467.52 787.5,1407.92 783,1403.42 783,1382 775.1,1374.1 ; 775.1,1374.52 775.1,1374.1 ; v1(907,760) 909,758 909,755.62 910.62,754 917,760.38 917,944.4 798.4,1063 786.38,1063 738.81,1110.58 738.81,1167.59 764.5,1193.28 764.5,1277.7 775.5,1288.7 775.5,1340.5 775.1,1340.9 775.1,1374.1
BH1: U1.38 U3_PWR1.2 | length 729.1
  Top Layer w8: v1(1083,476) 1095.02,476 1103.52,467.5 1108.12,467.5 1125.12,450.5 1174.5,450.5 1197.5,473.5 1207.32,473.5 1220.5,486.68 1220.5,496.5 1288,564 U3_PWR1.2@1356.51,564 ; U1.38@1093.96,836.45 1093.96,836.04 1123.5,806.5 1123.5,774.88 ; v1@1098.5,677.5 1123,702 1123,774.38
  Bottom Layer w8: v1@1081,480 1077,484 1077,550.18 1077.5,550.68 1077.5,558.72 1081.5,562.72 1081.5,591.72 1088.5,598.72 1088.5,612.88 1091.5,615.88 1091.5,646.12 1088.5,649.12 1088.5,670.5 v1@1097,679
  other v1: 1096,680
BH2: U1.46 U3_PWR2.2 | length 1196.2
  Top Layer w8: v1@747,574 819,502 952.18,502 978.18,528 996.6,528 ; 998.6,528 1004.82,528 1018.82,514 1057.82,514 ; 1059.82,512 1067.38,512 ; 1067.88,512.5 1102.72,512.5 1116.22,499 1185,499 ; U1.46@1205.31,947.8 1206.2,947.8 1222.31,931.69 1249.1,931.69 1254.65,937.24 1262.93,937.24 1269.17,931 1278.76,931 1285,937.24 1285,933 1284,932 1284,930 1282,932 1281.68,931.68 v1(1280.52,931.68)
  Bottom Layer w8: U3_PWR2.2@634.5,561 728,561 v1@740,573 ; v1(1198,496) 1184,510 1184,531.58 1196.5,544.08 1196.5,585.92 1193.5,588.92 1193.5,601.69 1207.5,615.69 1207.5,744.1 1202.5,749.1 1202.5,848.5 v1@1284,930 ; v1(1280.52,931.68) 1281.68,931.68 1282,932 v1@1284,930 ; v1@1284,932 v1@1284,930
  other v1: 742,573
BH3: U1.54 U3_PWR3.2 | length 601.2
  Top Layer w8: U1.54@1163.55,1093.96 1186,1116.4 v1(1186,1117) ; v1(1195,1497) U3_PWR3.2@1352,1497
  Bottom Layer w8: v1(1186,1117) 1212.38,1143.38 1212.38,1165.8 1227,1180.42 1227,1390.4 1214,1403.4 1214,1479 1196.5,1496.5 1194.5,1496.5 v1(1195,1497)
BH4: U1.30 U3_PWR4.2 | length 1201.7
  Top Layer w8: v1(750,1534) v1(809,1534) ; v1@903,725 v1(903,727) ; v1@910,723.82 910,729.82 924.68,744.5 927.5,744.5 931.5,748.5 931.5,765.41 938.45,772.36 938.45,785.34 U1.30@947.8,794.69
  Bottom Layer w8: U3_PWR4.2@646,1496 712,1496 v1(750,1534) ; v1(809,1534) 802,1527 802,1509.82 801.5,1509.32 801.5,1479.68 802,1479.18 802,1461.22 801.5,1460.72 801.5,1402.12 797,1397.62 797,1376.2 789.5,1368.7 789.5,1282.9 780.5,1273.9 778.5,1271.9 778.5,1187.48 752.81,1161.79 752.81,1116.38 792.18,1077 804.2,1077 931,950.2 931,748.18 927.32,744.5 924.68,744.5 910,729.82 910,725 903,725 v1(903,727)
BL1: U1.39 U3_PWR1.3 | length 759.2
  Top Layer w8: v1@1093,432 1102.5,422.5 1186.3,422.5 1209.3,445.5 1218.92,445.5 1248.5,475.08 1248.5,484.9 1277.6,514 U3_PWR1.3@1356.51,514 ; U1.39@1107.88,850.37 1107.88,850.12 1138,820 ; v1@1123,663 1137,677 1137,740.38 ; 1138,741.38 1138,815.76 ; 1138.24,816 1138.24,820.24
  Bottom Layer w8: v1@1093,432 1105.5,444.5 1105.5,497.08 1091,511.58 1091,544.38 1091.5,544.88 1091.5,552.92 1095.5,556.92 1095.5,585.92 1102.5,592.92 1102.5,607.08 1105.5,610.08 1105.5,645.5 v1@1114.5,654.5
  other v1: 1093,431 1115,654
BL2: U1.47 U3_PWR2.3 | length 1138.5
  Top Layer w8: v1(741,503) 771,473 1048.18,473 1073.68,498.5 1092.32,498.5 1109.32,481.5 1113.92,481.5 1123.42,472 1165,472 v1@1167,474 ; U1.47@1219.23,961.72 1229.98,950.98 1230.24,951.24 v1@1256.24,951.24
  Bottom Layer w8: U3_PWR2.3@634.5,511 v1@733,511 ; v1@740,504 v1(741,503) ; v1@1166,476 1170,480 1170,492.18 1169.5,492.68 1169.5,503.68 1170.01,504.19 1170,537.38 1182.5,549.88 1182.5,580.12 1179.5,583.12 1179.5,607.48 1193.5,621.48 1193.5,686.52 1187,693.02 1187,693.18 1191.5,697.68 1191.5,716.32 1187.92,719.9 1188.5,720.48 1188.5,883.5 v1(1265,960)
  other v1: 1166,474
BL3: U1.55 U3_PWR3.3 | length 571.7
  Top Layer w8: U1.55@1150,1108 1163.5,1121.5 1163.5,1126.32 1174,1136.82 v1(1174,1156) ; v1@1175,1449 U3_PWR3.3@1347,1449
  Bottom Layer w8: v1(1174,1156) 1213,1195 1213,1384.6 1200,1397.6 1200,1450 1178,1450 v1@1175,1447
  other v1: 1174,1448
BL4: U1.31 U3_PWR4.3 | length 1171
  Top Layer w8: v1(751,1472) 754,1472 779.38,1497.38 824,1497.38 v1(824,1489) ; v1@938,720 952,734 952,766.11 961.72,775.83 U1.31@961.72,780.77
  Bottom Layer w8: U3_PWR4.3@648,1445 651,1448 727,1448 v1(751,1472) ; 802.3,1274.3 800.7,1274.3 792.5,1266.1 792.5,1181.69 766.81,1155.99 766.81,1122.17 797.98,1091 810,1091 945,956 945,727 938,720 936,720 v1(934,722) ; 803.5,1277.6 803.5,1362.9 811,1370.4 811,1391.82 815.5,1396.32 815.5,1420 ; 815.5,1413.08 815.5,1420 ; v1(824,1489) 816,1481 816,1477.22 826.9,1466.32 815.5,1454.92 815.5,1420
CH1: U1.40 U4_PWR1.2 | length 825.1
  Top Layer w8: U1.40@1121.8,864.29 1121.8,862.63 1162,822.43 1162,806 1165,803 1164,801 1163,800 v1(1161,800) ; v1(1161,372) 1159,372 1167.5,380.5 1210.7,380.5 1262.2,329 U4_PWR1.2@1356.51,329
  Bottom Layer w8: v1(1161,372) 1159,372 1165,378 1165,398 ; v1@1164,801 1163,800 v1(1161,800) 1144,800 1121.5,777.5 1121.5,744.68 1116.5,739.68 1116.5,691.32 1118.5,689.32 1118.5,682.32 1137.5,663.32 1137.5,644.68 1119.5,626.68 1119.5,604.28 1116.5,601.28 1116.5,587.12 1109.5,580.12 1109.5,551.12 1105.5,547.12 1105.5,539.08 1105,538.58 1105,517.38 1131.38,491 1129.5,489.12 1129.5,458.88 1165,423.38 1165,398 ; 1165,395 1165,398
CH2: U1.48 U4_PWR2.2 | length 1396.3
  Top Layer w8: v1@697,348 697,338 696,337 697.5,335.5 706.32,335.5 706.42,335.4 706.42,348.06 730.01,371.64 730.01,392.36 729.18,393.18 795,459 955,459 966.98,447.02 991.8,447.02 1007.5,431.32 1007.5,428.5 1027.5,408.5 1206.5,408.5 v1(1218,420) ; U1.48@1242,968 1234.36,975.64 U1.48@1233.15,975.64 1240.01,982.5 1275.5,982.5 v1(1298,960)
  Bottom Layer w8: U4_PWR2.2@634.5,326 678.18,326 687.68,335.5 694.5,335.5 697,338 v1@697,348 ; 1221.5,619 1221.5,609.89 1207.5,595.89 1207.5,594.72 1210.5,591.72 1210.5,549.2 1220.5,539.2 1220.5,486.68 1217,483.18 1217,430 v1@1224,423 ; 1222,619 1221.5,619.5 1221.5,646.3 1222,646.8 1222,772.38 1216.5,777.88 1216.5,835.84 1306.5,925.84 1306.5,951.5 v1(1298,960)
  other v1: 697,346
CH3: U1.26 U4_PWR3.2 | length 1565.8
  Top Layer w8: v1(751,1438) 764,1438 764,1434 785,1455 855.18,1455 856.68,1456.5 875.32,1456.5 889.82,1471 925.58,1471 930.08,1475.5 1114.68,1475.5 1164.68,1425.5 1181.3,1425.5 1261.99,1344.81 1261.99,1309.71 1267.5,1304.2 1267.5,1303.72 1283.22,1288 1318.8,1288 1343.8,1263 U4_PWR3.2@1356.5,1263 ; v1(861,810) 867,810 873,816 875,816 875,833.24 U1.26@892.12,850.37 880,838.24
  Bottom Layer w8: v1@749,1439 746.18,1439 723.5,1416.32 723.5,1344.28 733,1334.78 733,1308.23 732,1307.23 732,1306.09 732.5,1305.59 732.5,1305.1 722,1294.6 722,1286.82 722.5,1286.32 722.5,1210.68 709.32,1197.5 702.5,1197.5 696.81,1191.81 696.81,1093.18 769.89,1020.1 781.91,1020.1 875,927.01 875,818 867,810 v1(861,810)
CH4: U1.32 U4_PWR4.2 | length 1158.2
  Top Layer w8: v1(700,1277) 749,1277 817.5,1345.5 817.5,1349.32 839.18,1371 843,1371 ; v1@937,692.82 951.68,707.5 957.32,707.5 967.5,717.68 967.5,757.5 975.64,765.64 U1.32@975.64,766.85
  Bottom Layer w8: U4_PWR4.2@644,1261 U4_PWR4.2@645,1262 ; U4_PWR4.2@646,1260 655,1269 v1@699,1269 ; 816.7,1104.1 820.8,1100 ; v1(834,1382) 844,1372 843,1372 ; v1@841,1372 843,1372 ; 845,1374 843,1372 ; v1@937,692.82 951.68,707.5 ; 952.5,707.5 959,714 959,837.8 ; 959,848.81 959,961.8 820.8,1100 ; 959.5,838.3 959.5,848.31 ; 820.8,1100 815.8,1105 803.78,1105 780.81,1127.97 780.81,1150.19 806.5,1175.89 806.5,1260.3 808.1,1260.3 816.3,1268.51 816.3,1270.6 817.5,1271.8 817.5,1349.32 830.68,1362.5 834.5,1362.5 836.5,1364.5 836.5,1365.5 843,1372
  other v1: 930,686
CL1: U1.41 U4_PWR1.3 | length 805.8
  Top Layer w8: U1.41@1135.71,878.21 1135.79,878.21 1145.07,868.93 1145.07,859.16 1186.5,817.73 1186.5,791.68 v1@1166.82,772 ; v1@1209.2,341.8 1272,279 U4_PWR1.3@1356.51,279
  Bottom Layer w8: 1139.68,743.68 1135.5,739.5 1135.5,738.88 1130.5,733.88 1130.5,697.12 1132.5,695.12 1132.5,688.12 1151.5,669.12 1151.5,638.88 1133.5,620.88 1133.5,598.48 1130.5,595.48 1130.5,581.32 1123.5,574.32 1123.5,545.32 1119.5,541.32 1119.5,522.68 1151.18,491 1143.5,483.32 1143.5,464.68 1179,429.18 1179,397 ; 1142.5,747.32 1155.68,760.5 ; 1179,390.7 1179,397 ; v1(1200,337) 1200,340 1186,354 1186,390 1179,397
  other v1: 1165,769
CL2: U1.49 U4_PWR2.3 | length 1445.1
  Top Layer w8: v1@714.18,277 719.5,282.32 719.5,305.7 741.12,327.32 ; 741.5,327.32 741.5,343.54 758.01,360.05 758.01,382.41 806.6,431 923.22,431 ; 923.82,431 937.5,417.32 ; 937.5,416.72 954.72,399.5 1004.5,399.5 1009.5,394.5 1215.5,394.5 ; 1218,393 v1(1237,393) ; U1.49@1240.79,1032 U1.49@1233.15,1024.36 1257.64,1024.36 v1@1261,1021
  Bottom Layer w8: U4_PWR2.3@634.5,276 v1@703,276 ; v1@1238,394 1249,405 1249,530.5 1227.5,552 1227.5,596.09 1236,604.59 1236,778.18 1230.5,783.68 1230.5,830.04 1320.5,920.04 1320.5,972.5 v1@1273,1020
  other v1: 703,279 1264,1022
CL3: U1.27 U4_PWR3.3 | length 1578.2
  Top Layer w8: v1(746,1407) 750.5,1411.5 875.45,1411.5 906.95,1443 937.18,1443 941.68,1447.5 1101.7,1447.5 1153.5,1395.7 1154.2,1395 1172.2,1395 1233.99,1333.21 1233.99,1298.11 1239.5,1292.6 ; v1@866.5,771.12 896.45,801.07 896.45,826.85 U1.27@906.04,836.45 ; 1239.5,1292.12 1318.62,1213 U4_PWR3.3@1356.5,1213 U4_PWR3.3@1359,1213
  Bottom Layer w8: v1(746,1407) v1@751,1407 ; 747,1300.29 746.5,1299.79 746.5,1299.3 736.5,1289.3 736.5,1204.88 715.12,1183.5 713.12,1183.5 710.81,1181.19 710.81,1098.98 775.69,1034.1 787.71,1034.1 889,932.8 889,797.62 v1@866.5,775.12 ; 747.1,1299.9 747.1,1403.1 v1@751,1407 ; v1@755,1407 v1@751,1407
  other v1: 860,770
CL4: U1.33 U4_PWR4.3 | length 1095.1
  Top Layer w8: v1@705,1227 700,1222 v1(700,1220) 756,1220 835,1299 v1(840,1299) ; v1@964.5,684.5 964.5,687.5 981.5,704.5 981.5,712.5 1029,760 1029,762.21 U1.33@1024.36,766.85
  Bottom Layer w8: U4_PWR4.3@643.5,1212 682,1212 694,1224 702,1224 700,1222 v1(700,1220) ; v1(840,1299) 836,1303 831.5,1298.5 831.5,1263.9 820.5,1252.9 820.5,1170.09 795,1144.59 795,1133.58 809.58,1119 821.6,1119 973,967.6 973,967 973.5,966.5 ; v1(961,685) 967,685 968,684 973,689 973,693.4 973.5,693.9 973.5,784.72 973,785.22 973,832 973.5,832.5 973.5,966.5 ; 973.5,967.1 973.5,966.5 ; 974,966 973.5,966.5